# Altium PCB uTCA_MCH_PCB1_template.PcbDoc (part 1 of 2)
Units mm, origin at the board's own origin, x right, y up, seen from the top; angles counter-clockwise.
Board outline 182.75 x 75.8 mm, 2 copper layers (Top Layer, Bottom Layer); 3 components, 0 nets, 1517 pads, 0 vias.
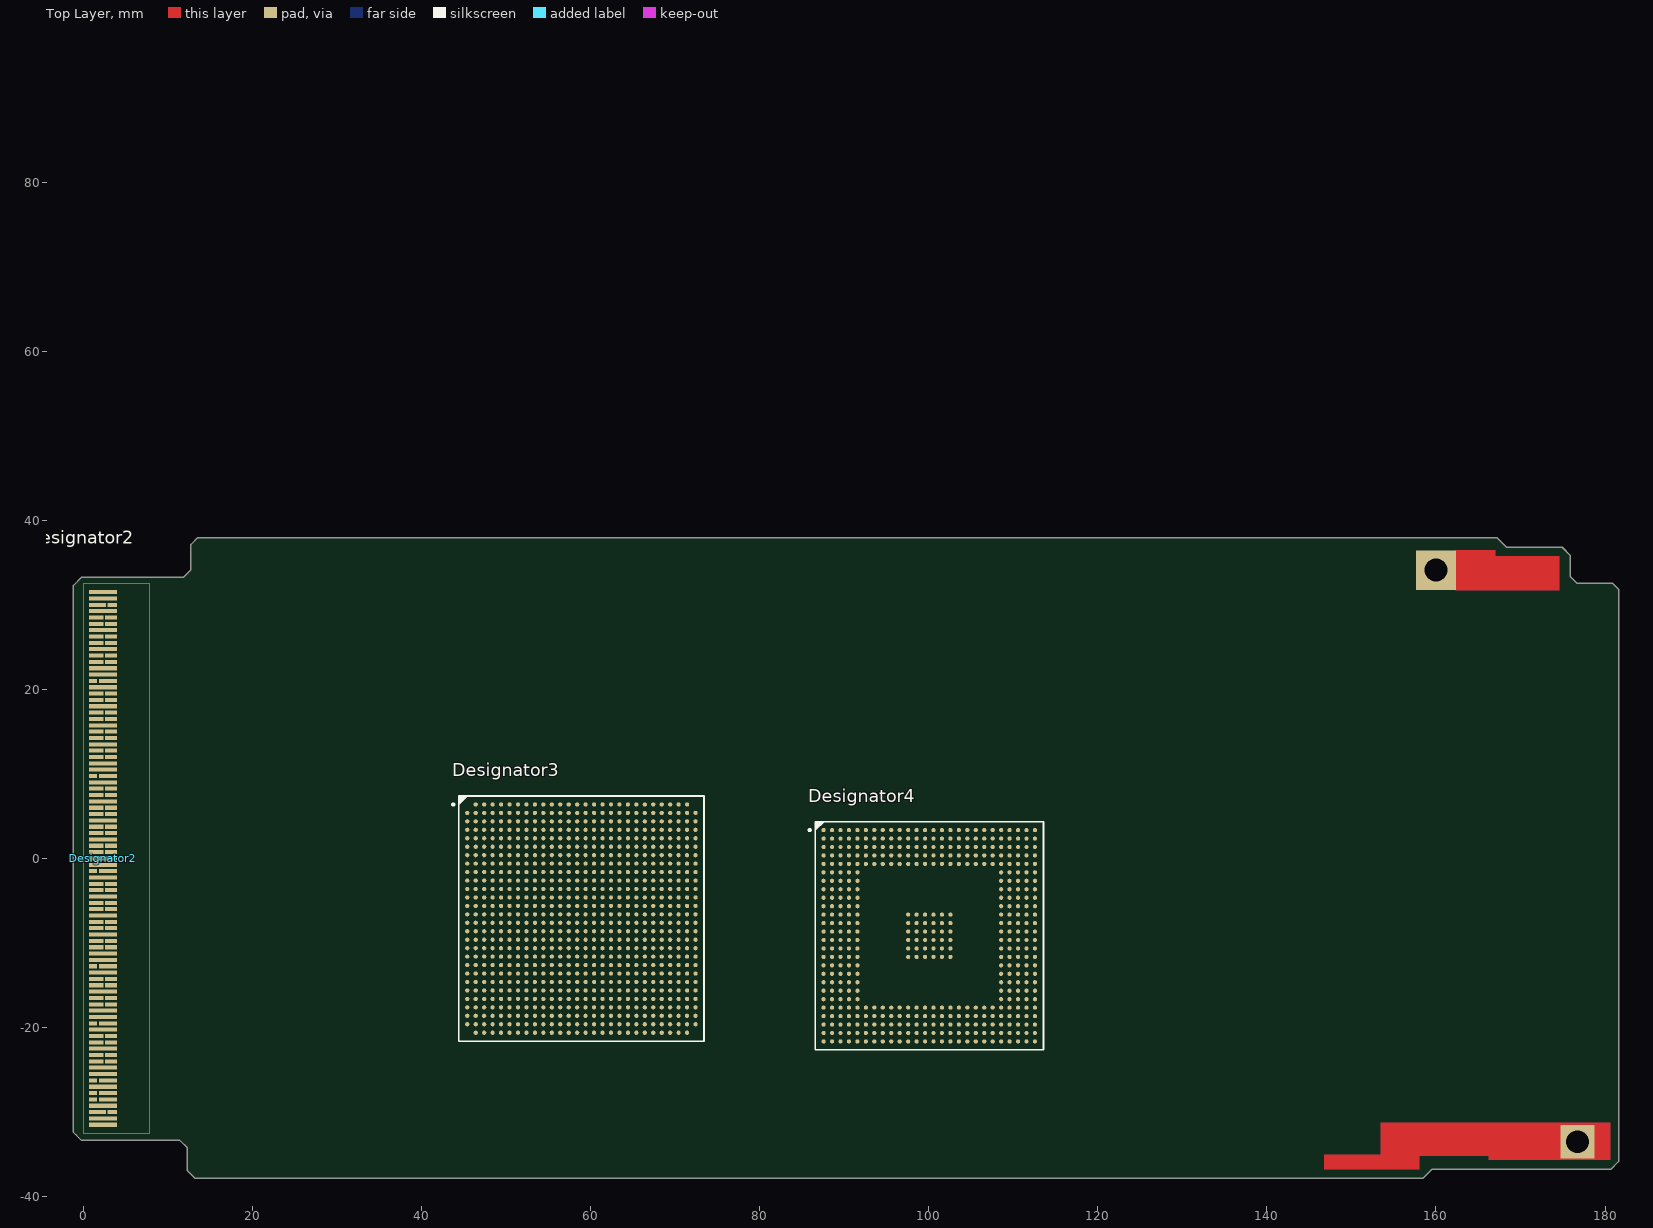
[diagram p0: Top Layer view]
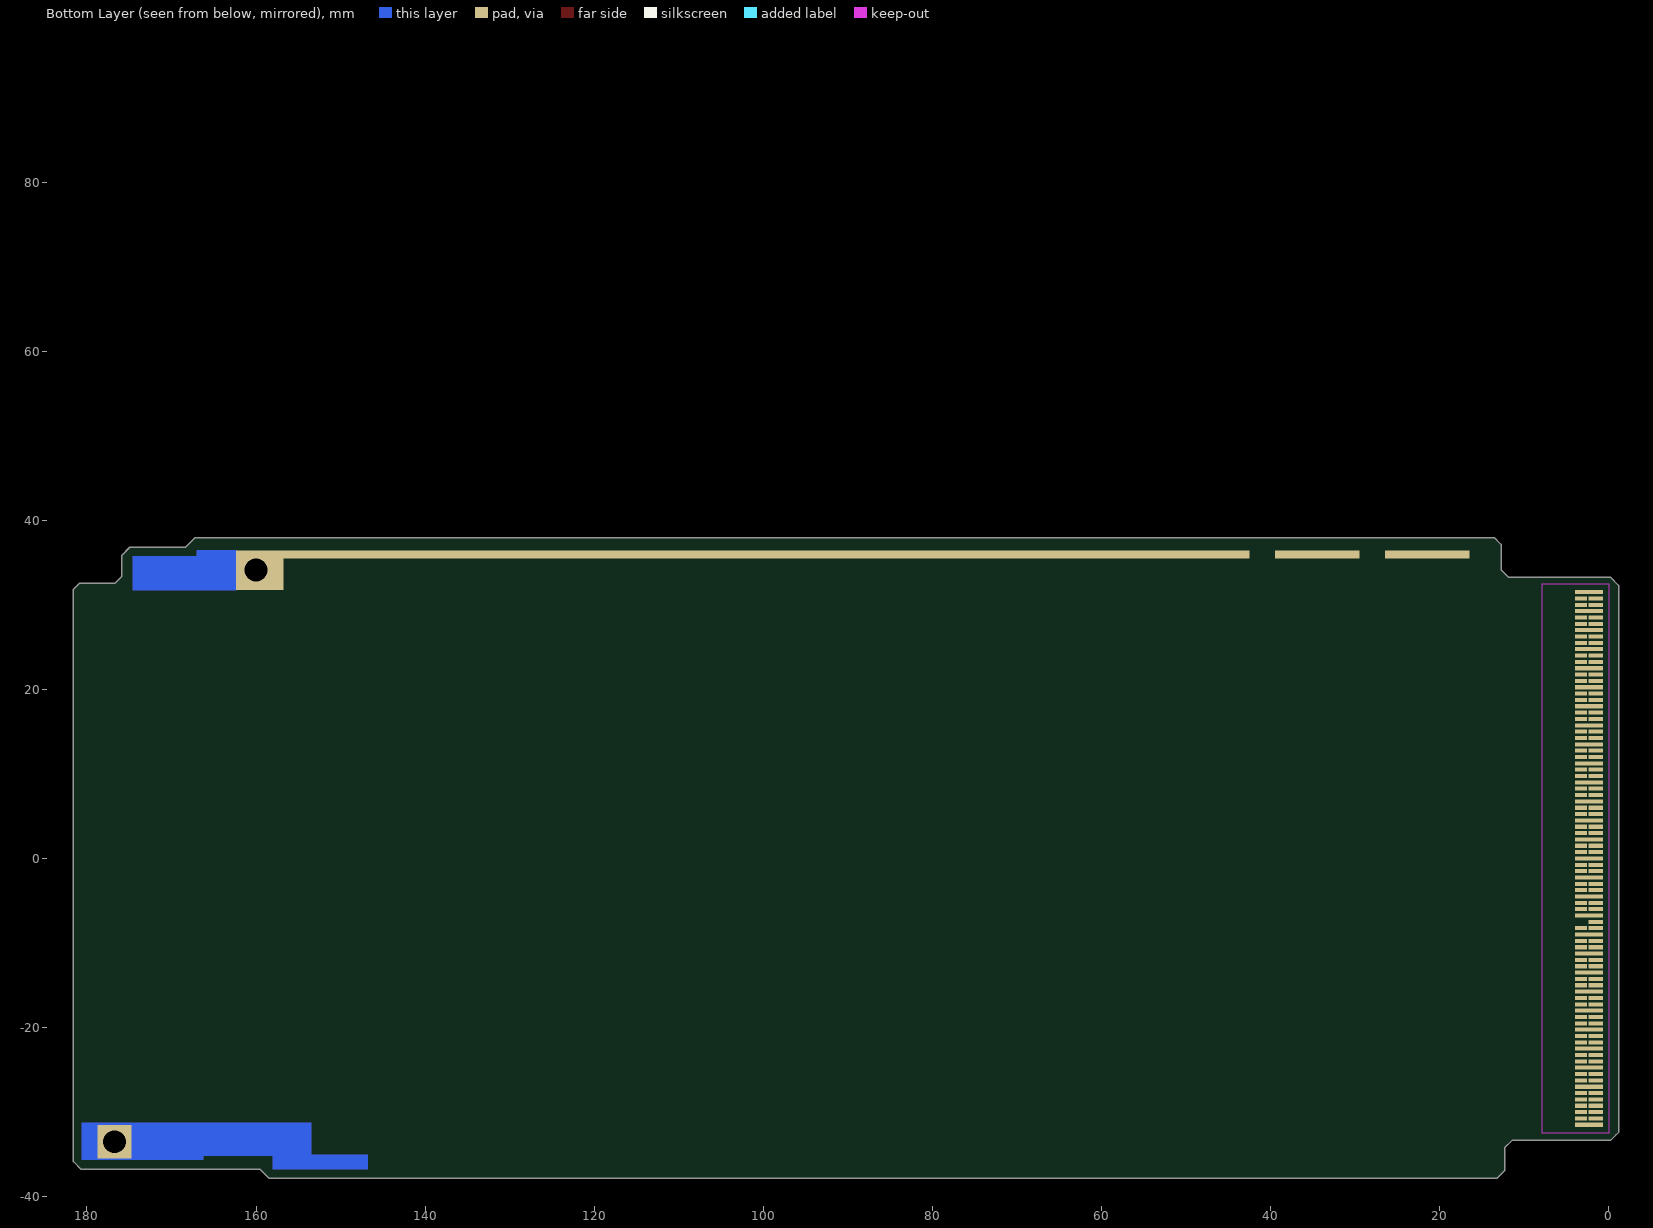
[diagram p1: Bottom Layer view, seen from below]

## Layer stack, top to bottom
Top Layer: signal copper 0.0356
Dielectric: dielectric 0.32, FR-4, Dk 4.8
Bottom Layer: signal copper 0.0356

## Board outline
-1.15,32.3 -0.2,33.25 11.6,33.25 11.85,33.25 12.75,34.15 12.75,37.15 13.55,37.95 167.2,37.95 168.35,36.8 174.95,36.8 175.9,35.85 175.9,33.35 176.7,32.55 180.9,32.55 181.6,31.85 181.6,-35.85 180.7,-36.75 159.55,-36.75 158.45,-37.85 13.25,-37.85 12.3,-36.9 12.3,-34.2 11.45,-33.35 -0.2,-33.35 -0.85,-32.7 -1.15,-32.4 -1.15,32.3

## Design rules (kind name [scope] priority, off if disabled: settings)
Clearance [All] p1: gap=0.254
HoleSize [All] p1: absolutevalues=TRUE maxlimit=3 minlimit=0.025 maxpercent=80.000 minpercent=20.000
PolygonConnect [All] p1: connectstyle=Relief reliefconductorwidth=0.254 reliefentries=4 polygonreliefangle="90 Angle"
RoutingVias [All] p1: holewidth=0.711 width=1.27 viastyle="Through Hole" minholewidth=0.711 minwidth=1.27 maxholewidth=0.711 maxwidth=1.27
SolderMaskExpansion [All] p1: expansion=0.102
TestPointUsage [All] p1: valid=0 allowmultiple=FALSE
Testpoint [All] p1: side=15 testpointundercomponent=TRUE minsize=1.016 maxsize=2.54 preferedsize=1.524 minholesize=0 maxholesize=1.016 preferedholesize=0.813 testpointgrid=0.025 style=1023 order=0123456789
Width [All] p1: maxlimit=0.254 minlimit=0.254 preferedwidth=0.254
18 further rules are at their usual default settings.

## Components (designator, comment, footprint, x,y, rotation, side; value= is the part's Value field where it differs from the comment)
Designator2 "Comment" UTCA_MCH_TONGUE1 0,0 r0 top
Designator3 "Comment" FBGA780-2 58.928,-7.112 r0 top
Designator4 "Comment" E-PBGA456_60 100.076,-9.144 r0 top

## Footprints (in the part's own frame and the unit in brackets; to place one, negate y for a bottom-side part, rotate by r counter-clockwise, add the part's x,y. Pads: shape width x height; smd on the part's side, far side on the other; paste and mask are expansions set on the pad)
E-PBGA456_60 [mm] "BGA, 456-Leads, Body 27x27mm, Pitch 1mm"
  round 0.5 smd: A1(-12.5,12.5) A2(-11.5,12.5) A3(-10.5,12.5) A4(-9.5,12.5) A5(-8.5,12.5) A6(-7.5,12.5) A7(-6.5,12.5) A8(-5.5,12.5) A9(-4.5,12.5) A10(-3.5,12.5) A11(-2.5,12.5) A12(-1.5,12.5) A13(-0.5,12.5) A14(0.5,12.5) A15(1.5,12.5) A16(2.5,12.5) A17(3.5,12.5) A18(4.5,12.5) A19(5.5,12.5) A20(6.5,12.5) A21(7.5,12.5) A22(8.5,12.5) A23(9.5,12.5) A24(10.5,12.5) A25(11.5,12.5) A26(12.5,12.5) AA1(-12.5,-7.5) AA2(-11.5,-7.5) AA3(-10.5,-7.5) AA4(-9.5,-7.5) AA5(-8.5,-7.5) AA22(8.5,-7.5) AA23(9.5,-7.5) AA24(10.5,-7.5) AA25(11.5,-7.5) AA26(12.5,-7.5) AB1(-12.5,-8.5) AB2(-11.5,-8.5) AB3(-10.5,-8.5) AB4(-9.5,-8.5) AB5(-8.5,-8.5) AB6(-7.5,-8.5) AB7(-6.5,-8.5) AB8(-5.5,-8.5) AB9(-4.5,-8.5) AB10(-3.5,-8.5) AB11(-2.5,-8.5) AB12(-1.5,-8.5) AB13(-0.5,-8.5) AB14(0.5,-8.5) AB15(1.5,-8.5) AB16(2.5,-8.5) AB17(3.5,-8.5) AB18(4.5,-8.5) AB19(5.5,-8.5) AB20(6.5,-8.5) AB21(7.5,-8.5) AB22(8.5,-8.5) AB23(9.5,-8.5) AB24(10.5,-8.5) AB25(11.5,-8.5) AB26(12.5,-8.5) AC1(-12.5,-9.5) AC2(-11.5,-9.5) AC3(-10.5,-9.5) AC4(-9.5,-9.5) AC5(-8.5,-9.5) AC6(-7.5,-9.5) AC7(-6.5,-9.5) AC8(-5.5,-9.5) AC9(-4.5,-9.5) AC10(-3.5,-9.5) AC11(-2.5,-9.5) AC12(-1.5,-9.5) AC13(-0.5,-9.5) AC14(0.5,-9.5) AC15(1.5,-9.5) AC16(2.5,-9.5) AC17(3.5,-9.5) AC18(4.5,-9.5) AC19(5.5,-9.5) AC20(6.5,-9.5) AC21(7.5,-9.5) AC22(8.5,-9.5) AC23(9.5,-9.5) AC24(10.5,-9.5) AC25(11.5,-9.5) AC26(12.5,-9.5) AD1(-12.5,-10.5) AD2(-11.5,-10.5) AD3(-10.5,-10.5) AD4(-9.5,-10.5) AD5(-8.5,-10.5) AD6(-7.5,-10.5) AD7(-6.5,-10.5) AD8(-5.5,-10.5) AD9(-4.5,-10.5) AD10(-3.5,-10.5) AD11(-2.5,-10.5) AD12(-1.5,-10.5) AD13(-0.5,-10.5) AD14(0.5,-10.5) AD15(1.5,-10.5) AD16(2.5,-10.5) AD17(3.5,-10.5) AD18(4.5,-10.5) AD19(5.5,-10.5) AD20(6.5,-10.5) AD21(7.5,-10.5) AD22(8.5,-10.5) AD23(9.5,-10.5) AD24(10.5,-10.5) AD25(11.5,-10.5) AD26(12.5,-10.5) AE1(-12.5,-11.5) AE2(-11.5,-11.5) AE3(-10.5,-11.5) AE4(-9.5,-11.5) AE5(-8.5,-11.5) AE6(-7.5,-11.5) AE7(-6.5,-11.5) AE8(-5.5,-11.5) AE9(-4.5,-11.5) AE10(-3.5,-11.5) AE11(-2.5,-11.5) AE12(-1.5,-11.5) AE13(-0.5,-11.5) AE14(0.5,-11.5) AE15(1.5,-11.5) AE16(2.5,-11.5) AE17(3.5,-11.5) AE18(4.5,-11.5) AE19(5.5,-11.5) AE20(6.5,-11.5) AE21(7.5,-11.5) AE22(8.5,-11.5) AE23(9.5,-11.5) AE24(10.5,-11.5) AE25(11.5,-11.5) AE26(12.5,-11.5) AF1(-12.5,-12.5) AF2(-11.5,-12.5) AF3(-10.5,-12.5) AF4(-9.5,-12.5) AF5(-8.5,-12.5) AF6(-7.5,-12.5) AF7(-6.5,-12.5) AF8(-5.5,-12.5) AF9(-4.5,-12.5) AF10(-3.5,-12.5) AF11(-2.5,-12.5) AF12(-1.5,-12.5) AF13(-0.5,-12.5) AF14(0.5,-12.5) AF15(1.5,-12.5) AF16(2.5,-12.5) AF17(3.5,-12.5) AF18(4.5,-12.5) AF19(5.5,-12.5) AF20(6.5,-12.5) AF21(7.5,-12.5) AF22(8.5,-12.5) AF23(9.5,-12.5) AF24(10.5,-12.5) AF25(11.5,-12.5) AF26(12.5,-12.5) B1(-12.5,11.5) B2(-11.5,11.5) B3(-10.5,11.5) B4(-9.5,11.5) B5(-8.5,11.5) B6(-7.5,11.5) B7(-6.5,11.5) B8(-5.5,11.5) B9(-4.5,11.5) B10(-3.5,11.5) B11(-2.5,11.5) B12(-1.5,11.5) B13(-0.5,11.5) B14(0.5,11.5) B15(1.5,11.5) B16(2.5,11.5) B17(3.5,11.5) B18(4.5,11.5) B19(5.5,11.5) B20(6.5,11.5) B21(7.5,11.5) B22(8.5,11.5) B23(9.5,11.5) B24(10.5,11.5) B25(11.5,11.5) B26(12.5,11.5) C1(-12.5,10.5) C2(-11.5,10.5) C3(-10.5,10.5) C4(-9.5,10.5) C5(-8.5,10.5) C6(-7.5,10.5) C7(-6.5,10.5) C8(-5.5,10.5) C9(-4.5,10.5) C10(-3.5,10.5) C11(-2.5,10.5) C12(-1.5,10.5) C13(-0.5,10.5) C14(0.5,10.5) C15(1.5,10.5) C16(2.5,10.5) C17(3.5,10.5) C18(4.5,10.5) C19(5.5,10.5) C20(6.5,10.5) C21(7.5,10.5) C22(8.5,10.5) C23(9.5,10.5) C24(10.5,10.5) C25(11.5,10.5) C26(12.5,10.5) D1(-12.5,9.5) D2(-11.5,9.5) D3(-10.5,9.5) D4(-9.5,9.5) D5(-8.5,9.5) D6(-7.5,9.5) D7(-6.5,9.5) D8(-5.5,9.5) D9(-4.5,9.5) D10(-3.5,9.5) D11(-2.5,9.5) D12(-1.5,9.5) D13(-0.5,9.5) D14(0.5,9.5) D15(1.5,9.5) D16(2.5,9.5) D17(3.5,9.5) D18(4.5,9.5) D19(5.5,9.5) D20(6.5,9.5) D21(7.5,9.5) D22(8.5,9.5) D23(9.5,9.5) D24(10.5,9.5) D25(11.5,9.5) D26(12.5,9.5) E1(-12.5,8.5) E2(-11.5,8.5) E3(-10.5,8.5) E4(-9.5,8.5) E5(-8.5,8.5) E6(-7.5,8.5) E7(-6.5,8.5) E8(-5.5,8.5) E9(-4.5,8.5) E10(-3.5,8.5) E11(-2.5,8.5) E12(-1.5,8.5) E13(-0.5,8.5) E14(0.5,8.5) E15(1.5,8.5) E16(2.5,8.5) E17(3.5,8.5) E18(4.5,8.5) E19(5.5,8.5) E20(6.5,8.5) E21(7.5,8.5) E22(8.5,8.5) E23(9.5,8.5) E24(10.5,8.5) E25(11.5,8.5) E26(12.5,8.5) F1(-12.5,7.5) F2(-11.5,7.5) F3(-10.5,7.5) F4(-9.5,7.5) F5(-8.5,7.5) F22(8.5,7.5) F23(9.5,7.5) F24(10.5,7.5) F25(11.5,7.5) F26(12.5,7.5) G1(-12.5,6.5) G2(-11.5,6.5) G3(-10.5,6.5) G4(-9.5,6.5) G5(-8.5,6.5) G22(8.5,6.5) G23(9.5,6.5) G24(10.5,6.5) G25(11.5,6.5) G26(12.5,6.5) H1(-12.5,5.5) H2(-11.5,5.5) H3(-10.5,5.5) H4(-9.5,5.5) H5(-8.5,5.5) H22(8.5,5.5) H23(9.5,5.5) H24(10.5,5.5) H25(11.5,5.5) H26(12.5,5.5) J1(-12.5,4.5) J2(-11.5,4.5) J3(-10.5,4.5) J4(-9.5,4.5) J5(-8.5,4.5) J22(8.5,4.5) J23(9.5,4.5) J24(10.5,4.5) J25(11.5,4.5) J26(12.5,4.5) K1(-12.5,3.5) K2(-11.5,3.5) K3(-10.5,3.5) K4(-9.5,3.5) K5(-8.5,3.5) K22(8.5,3.5) K23(9.5,3.5) K24(10.5,3.5) K25(11.5,3.5) K26(12.5,3.5) L1(-12.5,2.5) L2(-11.5,2.5) L3(-10.5,2.5) L4(-9.5,2.5) L5(-8.5,2.5) L11(-2.5,2.5) L12(-1.5,2.5) L13(-0.5,2.5) L14(0.5,2.5) L15(1.5,2.5) L16(2.5,2.5) L22(8.5,2.5) L23(9.5,2.5) L24(10.5,2.5) L25(11.5,2.5) L26(12.5,2.5) M1(-12.5,1.5) M2(-11.5,1.5) M3(-10.5,1.5) M4(-9.5,1.5) M5(-8.5,1.5) M11(-2.5,1.5) M12(-1.5,1.5) M13(-0.5,1.5) M14(0.5,1.5) M15(1.5,1.5) M16(2.5,1.5) M22(8.5,1.5) M23(9.5,1.5) M24(10.5,1.5) M25(11.5,1.5) M26(12.5,1.5) N1(-12.5,0.5) N2(-11.5,0.5) N3(-10.5,0.5) N4(-9.5,0.5) N5(-8.5,0.5) N11(-2.5,0.5) N12(-1.5,0.5) N13(-0.5,0.5) N14(0.5,0.5) N15(1.5,0.5) N16(2.5,0.5) N22(8.5,0.5) N23(9.5,0.5) N24(10.5,0.5) N25(11.5,0.5) N26(12.5,0.5) P1(-12.5,-0.5) P2(-11.5,-0.5) P3(-10.5,-0.5) P4(-9.5,-0.5) P5(-8.5,-0.5) P11(-2.5,-0.5) P12(-1.5,-0.5) P13(-0.5,-0.5) P14(0.5,-0.5) P15(1.5,-0.5) P16(2.5,-0.5) P22(8.5,-0.5) P23(9.5,-0.5) P24(10.5,-0.5) P25(11.5,-0.5) P26(12.5,-0.5) R1(-12.5,-1.5) R2(-11.5,-1.5) R3(-10.5,-1.5) R4(-9.5,-1.5) R5(-8.5,-1.5) R11(-2.5,-1.5) R12(-1.5,-1.5) R13(-0.5,-1.5) R14(0.5,-1.5) R15(1.5,-1.5) R16(2.5,-1.5) R22(8.5,-1.5) R23(9.5,-1.5) R24(10.5,-1.5) R25(11.5,-1.5) R26(12.5,-1.5) T1(-12.5,-2.5) T2(-11.5,-2.5) T3(-10.5,-2.5) T4(-9.5,-2.5) T5(-8.5,-2.5) T11(-2.5,-2.5) T12(-1.5,-2.5) T13(-0.5,-2.5) T14(0.5,-2.5) T15(1.5,-2.5) T16(2.5,-2.5) T22(8.5,-2.5) T23(9.5,-2.5) T24(10.5,-2.5) T25(11.5,-2.5) T26(12.5,-2.5) U1(-12.5,-3.5) U2(-11.5,-3.5) U3(-10.5,-3.5) U4(-9.5,-3.5) U5(-8.5,-3.5) U22(8.5,-3.5) U23(9.5,-3.5) U24(10.5,-3.5) U25(11.5,-3.5) U26(12.5,-3.5) V1(-12.5,-4.5) V2(-11.5,-4.5) V3(-10.5,-4.5) V4(-9.5,-4.5) V5(-8.5,-4.5) V22(8.5,-4.5) V23(9.5,-4.5) V24(10.5,-4.5) V25(11.5,-4.5) V26(12.5,-4.5) W1(-12.5,-5.5) W2(-11.5,-5.5) W3(-10.5,-5.5) W4(-9.5,-5.5) W5(-8.5,-5.5) W22(8.5,-5.5) W23(9.5,-5.5) W24(10.5,-5.5) W25(11.5,-5.5) W26(12.5,-5.5) Y1(-12.5,-6.5) Y2(-11.5,-6.5) Y3(-10.5,-6.5) Y4(-9.5,-6.5) Y5(-8.5,-6.5) Y22(8.5,-6.5) Y23(9.5,-6.5) Y24(10.5,-6.5) Y25(11.5,-6.5) Y26(12.5,-6.5)
  silkscreen extent -14.27,-13.5 13.5,13.5, body extent -13.5,-13.5 13.5,13.5, height 2.65
FBGA780-2 [mm] "BGA, 780-Leads, Body 29x29mm, Pitch 1mm"
  round 0.5 smd: A2(-12.5,13.5) A3(-11.5,13.5) A4(-10.5,13.5) A5(-9.5,13.5) A6(-8.5,13.5) A7(-7.5,13.5) A8(-6.5,13.5) A9(-5.5,13.5) A10(-4.5,13.5) A11(-3.5,13.5) A12(-2.5,13.5) A13(-1.5,13.5) A14(-0.5,13.5) A15(0.5,13.5) A16(1.5,13.5) A17(2.5,13.5) A18(3.5,13.5) A19(4.5,13.5) A20(5.5,13.5) A21(6.5,13.5) A22(7.5,13.5) A23(8.5,13.5) A24(9.5,13.5) A25(10.5,13.5) A26(11.5,13.5) A27(12.5,13.5) AA1(-13.5,-6.5) AA2(-12.5,-6.5) AA3(-11.5,-6.5) AA4(-10.5,-6.5) AA5(-9.5,-6.5) AA6(-8.5,-6.5) AA7(-7.5,-6.5) AA8(-6.5,-6.5) AA9(-5.5,-6.5) AA10(-4.5,-6.5) AA11(-3.5,-6.5) AA12(-2.5,-6.5) AA13(-1.5,-6.5) AA14(-0.5,-6.5) AA15(0.5,-6.5) AA16(1.5,-6.5) AA17(2.5,-6.5) AA18(3.5,-6.5) AA19(4.5,-6.5) AA20(5.5,-6.5) AA21(6.5,-6.5) AA22(7.5,-6.5) AA23(8.5,-6.5) AA24(9.5,-6.5) AA25(10.5,-6.5) AA26(11.5,-6.5) AA27(12.5,-6.5) AA28(13.5,-6.5) AB1(-13.5,-7.5) AB2(-12.5,-7.5) AB3(-11.5,-7.5) AB4(-10.5,-7.5) AB5(-9.5,-7.5) AB6(-8.5,-7.5) AB7(-7.5,-7.5) AB8(-6.5,-7.5) AB9(-5.5,-7.5) AB10(-4.5,-7.5) AB11(-3.5,-7.5) AB12(-2.5,-7.5) AB13(-1.5,-7.5) AB14(-0.5,-7.5) AB15(0.5,-7.5) AB16(1.5,-7.5) AB17(2.5,-7.5) AB18(3.5,-7.5) AB19(4.5,-7.5) AB20(5.5,-7.5) AB21(6.5,-7.5) AB22(7.5,-7.5) AB23(8.5,-7.5) AB24(9.5,-7.5) AB25(10.5,-7.5) AB26(11.5,-7.5) AB27(12.5,-7.5) AB28(13.5,-7.5) AC1(-13.5,-8.5) AC2(-12.5,-8.5) AC3(-11.5,-8.5) AC4(-10.5,-8.5) AC5(-9.5,-8.5) AC6(-8.5,-8.5) AC7(-7.5,-8.5) AC8(-6.5,-8.5) AC9(-5.5,-8.5) AC10(-4.5,-8.5) AC11(-3.5,-8.5) AC12(-2.5,-8.5) AC13(-1.5,-8.5) AC14(-0.5,-8.5) AC15(0.5,-8.5) AC16(1.5,-8.5) AC17(2.5,-8.5) AC18(3.5,-8.5) AC19(4.5,-8.5) AC20(5.5,-8.5) AC21(6.5,-8.5) AC22(7.5,-8.5) AC23(8.5,-8.5) AC24(9.5,-8.5) AC25(10.5,-8.5) AC26(11.5,-8.5) AC27(12.5,-8.5) AC28(13.5,-8.5) AD1(-13.5,-9.5) AD2(-12.5,-9.5) AD3(-11.5,-9.5) AD4(-10.5,-9.5) AD5(-9.5,-9.5) AD6(-8.5,-9.5) AD7(-7.5,-9.5) AD8(-6.5,-9.5) AD9(-5.5,-9.5) AD10(-4.5,-9.5) AD11(-3.5,-9.5) AD12(-2.5,-9.5) AD13(-1.5,-9.5) AD14(-0.5,-9.5) AD15(0.5,-9.5) AD16(1.5,-9.5) AD17(2.5,-9.5) AD18(3.5,-9.5) AD19(4.5,-9.5) AD20(5.5,-9.5) AD21(6.5,-9.5) AD22(7.5,-9.5) AD23(8.5,-9.5) AD24(9.5,-9.5) AD25(10.5,-9.5) AD26(11.5,-9.5) AD27(12.5,-9.5) AD28(13.5,-9.5) AE1(-13.5,-10.5) AE2(-12.5,-10.5) AE3(-11.5,-10.5) AE4(-10.5,-10.5) AE5(-9.5,-10.5) AE6(-8.5,-10.5) AE7(-7.5,-10.5) AE8(-6.5,-10.5) AE9(-5.5,-10.5) AE10(-4.5,-10.5) AE11(-3.5,-10.5) AE12(-2.5,-10.5) AE13(-1.5,-10.5) AE14(-0.5,-10.5) AE15(0.5,-10.5) AE16(1.5,-10.5) AE17(2.5,-10.5) AE18(3.5,-10.5) AE19(4.5,-10.5) AE20(5.5,-10.5) AE21(6.5,-10.5) AE22(7.5,-10.5) AE23(8.5,-10.5) AE24(9.5,-10.5) AE25(10.5,-10.5) AE26(11.5,-10.5) AE27(12.5,-10.5) AE28(13.5,-10.5) AF1(-13.5,-11.5) AF2(-12.5,-11.5) AF3(-11.5,-11.5) AF4(-10.5,-11.5) AF5(-9.5,-11.5) AF6(-8.5,-11.5) AF7(-7.5,-11.5) AF8(-6.5,-11.5) AF9(-5.5,-11.5) AF10(-4.5,-11.5) AF11(-3.5,-11.5) AF12(-2.5,-11.5) AF13(-1.5,-11.5) AF14(-0.5,-11.5) AF15(0.5,-11.5) AF16(1.5,-11.5) AF17(2.5,-11.5) AF18(3.5,-11.5) AF19(4.5,-11.5) AF20(5.5,-11.5) AF21(6.5,-11.5) AF22(7.5,-11.5) AF23(8.5,-11.5) AF24(9.5,-11.5) AF25(10.5,-11.5) AF26(11.5,-11.5) AF27(12.5,-11.5) AF28(13.5,-11.5) AG1(-13.5,-12.5) AG2(-12.5,-12.5) AG3(-11.5,-12.5) AG4(-10.5,-12.5) AG5(-9.5,-12.5) AG6(-8.5,-12.5) AG7(-7.5,-12.5) AG8(-6.5,-12.5) AG9(-5.5,-12.5) AG10(-4.5,-12.5) AG11(-3.5,-12.5) AG12(-2.5,-12.5) AG13(-1.5,-12.5) AG14(-0.5,-12.5) AG15(0.5,-12.5) AG16(1.5,-12.5) AG17(2.5,-12.5) AG18(3.5,-12.5) AG19(4.5,-12.5) AG20(5.5,-12.5) AG21(6.5,-12.5) AG22(7.5,-12.5) AG23(8.5,-12.5) AG24(9.5,-12.5) AG25(10.5,-12.5) AG26(11.5,-12.5) AG27(12.5,-12.5) AG28(13.5,-12.5) AH2(-12.5,-13.5) AH3(-11.5,-13.5) AH4(-10.5,-13.5) AH5(-9.5,-13.5) AH6(-8.5,-13.5) AH7(-7.5,-13.5) AH8(-6.5,-13.5) AH9(-5.5,-13.5) AH10(-4.5,-13.5) AH11(-3.5,-13.5) AH12(-2.5,-13.5) AH13(-1.5,-13.5) AH14(-0.5,-13.5) AH15(0.5,-13.5) AH16(1.5,-13.5) AH17(2.5,-13.5) AH18(3.5,-13.5) AH19(4.5,-13.5) AH20(5.5,-13.5) AH21(6.5,-13.5) AH22(7.5,-13.5) AH23(8.5,-13.5) AH24(9.5,-13.5) AH25(10.5,-13.5) AH26(11.5,-13.5) AH27(12.5,-13.5) B1(-13.5,12.5) B2(-12.5,12.5) B3(-11.5,12.5) B4(-10.5,12.5) B5(-9.5,12.5) B6(-8.5,12.5) B7(-7.5,12.5) B8(-6.5,12.5) B9(-5.5,12.5) B10(-4.5,12.5) B11(-3.5,12.5) B12(-2.5,12.5) B13(-1.5,12.5) B14(-0.5,12.5) B15(0.5,12.5) B16(1.5,12.5) B17(2.5,12.5) B18(3.5,12.5) B19(4.5,12.5) B20(5.5,12.5) B21(6.5,12.5) B22(7.5,12.5) B23(8.5,12.5) B24(9.5,12.5) B25(10.5,12.5) B26(11.5,12.5) B27(12.5,12.5) B28(13.5,12.5) C1(-13.5,11.5) C2(-12.5,11.5) C3(-11.5,11.5) C4(-10.5,11.5) C5(-9.5,11.5) C6(-8.5,11.5) C7(-7.5,11.5) C8(-6.5,11.5) C9(-5.5,11.5) C10(-4.5,11.5) C11(-3.5,11.5) C12(-2.5,11.5) C13(-1.5,11.5) C14(-0.5,11.5) C15(0.5,11.5) C16(1.5,11.5) C17(2.5,11.5) C18(3.5,11.5) C19(4.5,11.5) C20(5.5,11.5) C21(6.5,11.5) C22(7.5,11.5) C23(8.5,11.5) C24(9.5,11.5) C25(10.5,11.5) C26(11.5,11.5) C27(12.5,11.5) C28(13.5,11.5) D1(-13.5,10.5) D2(-12.5,10.5) D3(-11.5,10.5) D4(-10.5,10.5) D5(-9.5,10.5) D6(-8.5,10.5) D7(-7.5,10.5) D8(-6.5,10.5) D9(-5.5,10.5) D10(-4.5,10.5) D11(-3.5,10.5) D12(-2.5,10.5) D13(-1.5,10.5) D14(-0.5,10.5) D15(0.5,10.5) D16(1.5,10.5) D17(2.5,10.5) D18(3.5,10.5) D19(4.5,10.5) D20(5.5,10.5) D21(6.5,10.5) D22(7.5,10.5) D23(8.5,10.5) D24(9.5,10.5) D25(10.5,10.5) D26(11.5,10.5) D27(12.5,10.5) D28(13.5,10.5) E1(-13.5,9.5) E2(-12.5,9.5) E3(-11.5,9.5) E4(-10.5,9.5) E5(-9.5,9.5) E6(-8.5,9.5) E7(-7.5,9.5) E8(-6.5,9.5) E9(-5.5,9.5) E10(-4.5,9.5) E11(-3.5,9.5) E12(-2.5,9.5) E13(-1.5,9.5) E14(-0.5,9.5) E15(0.5,9.5) E16(1.5,9.5) E17(2.5,9.5) E18(3.5,9.5) E19(4.5,9.5) E20(5.5,9.5) E21(6.5,9.5) E22(7.5,9.5) E23(8.5,9.5) E24(9.5,9.5) E25(10.5,9.5) E26(11.5,9.5) E27(12.5,9.5) E28(13.5,9.5) F1(-13.5,8.5) F2(-12.5,8.5) F3(-11.5,8.5) F4(-10.5,8.5) F5(-9.5,8.5) F6(-8.5,8.5) F7(-7.5,8.5) F8(-6.5,8.5) F9(-5.5,8.5) F10(-4.5,8.5) F11(-3.5,8.5) F12(-2.5,8.5) F13(-1.5,8.5) F14(-0.5,8.5) F15(0.5,8.5) F16(1.5,8.5) F17(2.5,8.5) F18(3.5,8.5) F19(4.5,8.5) F20(5.5,8.5) F21(6.5,8.5) F22(7.5,8.5) F23(8.5,8.5) F24(9.5,8.5) F25(10.5,8.5) F26(11.5,8.5) F27(12.5,8.5) F28(13.5,8.5) G1(-13.5,7.5) G2(-12.5,7.5) G3(-11.5,7.5) G4(-10.5,7.5) G5(-9.5,7.5) G6(-8.5,7.5) G7(-7.5,7.5) G8(-6.5,7.5) G9(-5.5,7.5) G10(-4.5,7.5) G11(-3.5,7.5) G12(-2.5,7.5) G13(-1.5,7.5) G14(-0.5,7.5) G15(0.5,7.5) G16(1.5,7.5) G17(2.5,7.5) G18(3.5,7.5) G19(4.5,7.5) G20(5.5,7.5) G21(6.5,7.5) G22(7.5,7.5) G23(8.5,7.5) G24(9.5,7.5) G25(10.5,7.5) G26(11.5,7.5) G27(12.5,7.5) G28(13.5,7.5) H1(-13.5,6.5) H2(-12.5,6.5) H3(-11.5,6.5) H4(-10.5,6.5) H5(-9.5,6.5) H6(-8.5,6.5) H7(-7.5,6.5) H8(-6.5,6.5) H9(-5.5,6.5) H10(-4.5,6.5) H11(-3.5,6.5) H12(-2.5,6.5) H13(-1.5,6.5) H14(-0.5,6.5) H15(0.5,6.5) H16(1.5,6.5) H17(2.5,6.5) H18(3.5,6.5) H19(4.5,6.5) H20(5.5,6.5) H21(6.5,6.5) H22(7.5,6.5) H23(8.5,6.5) H24(9.5,6.5) H25(10.5,6.5) H26(11.5,6.5) H27(12.5,6.5) H28(13.5,6.5) J1(-13.5,5.5) J2(-12.5,5.5) J3(-11.5,5.5) J4(-10.5,5.5) J5(-9.5,5.5) J6(-8.5,5.5) J7(-7.5,5.5) J8(-6.5,5.5) J9(-5.5,5.5) J10(-4.5,5.5) J11(-3.5,5.5) J12(-2.5,5.5) J13(-1.5,5.5) J14(-0.5,5.5) J15(0.5,5.5) J16(1.5,5.5) J17(2.5,5.5) J18(3.5,5.5) J19(4.5,5.5) J20(5.5,5.5) J21(6.5,5.5) J22(7.5,5.5) J23(8.5,5.5) J24(9.5,5.5) J25(10.5,5.5) J26(11.5,5.5) J27(12.5,5.5) J28(13.5,5.5) K1(-13.5,4.5) K2(-12.5,4.5) K3(-11.5,4.5) K4(-10.5,4.5) K5(-9.5,4.5) K6(-8.5,4.5) K7(-7.5,4.5) K8(-6.5,4.5) K9(-5.5,4.5) K10(-4.5,4.5) K11(-3.5,4.5) K12(-2.5,4.5) K13(-1.5,4.5) K14(-0.5,4.5) K15(0.5,4.5) K16(1.5,4.5) K17(2.5,4.5) K18(3.5,4.5) K19(4.5,4.5) K20(5.5,4.5) K21(6.5,4.5) K22(7.5,4.5) K23(8.5,4.5) K24(9.5,4.5) K25(10.5,4.5) K26(11.5,4.5) K27(12.5,4.5) K28(13.5,4.5) L1(-13.5,3.5) L2(-12.5,3.5) L3(-11.5,3.5) L4(-10.5,3.5) L5(-9.5,3.5) L6(-8.5,3.5) L7(-7.5,3.5) L8(-6.5,3.5) L9(-5.5,3.5) L10(-4.5,3.5) L11(-3.5,3.5) L12(-2.5,3.5) L13(-1.5,3.5) L14(-0.5,3.5) L15(0.5,3.5) L16(1.5,3.5) L17(2.5,3.5) L18(3.5,3.5) L19(4.5,3.5) L20(5.5,3.5) L21(6.5,3.5) L22(7.5,3.5) L23(8.5,3.5) L24(9.5,3.5) L25(10.5,3.5) L26(11.5,3.5) L27(12.5,3.5) L28(13.5,3.5) M1(-13.5,2.5) M2(-12.5,2.5) M3(-11.5,2.5) M4(-10.5,2.5) M5(-9.5,2.5) M6(-8.5,2.5) M7(-7.5,2.5) M8(-6.5,2.5) M9(-5.5,2.5) M10(-4.5,2.5) M11(-3.5,2.5) M12(-2.5,2.5) M13(-1.5,2.5) M14(-0.5,2.5) M15(0.5,2.5) M16(1.5,2.5) M17(2.5,2.5) M18(3.5,2.5) M19(4.5,2.5) M20(5.5,2.5) M21(6.5,2.5) M22(7.5,2.5) M23(8.5,2.5) M24(9.5,2.5) M25(10.5,2.5) M26(11.5,2.5) M27(12.5,2.5) M28(13.5,2.5) N1(-13.5,1.5) N2(-12.5,1.5) N3(-11.5,1.5) N4(-10.5,1.5) N5(-9.5,1.5) N6(-8.5,1.5) N7(-7.5,1.5) N8(-6.5,1.5) N9(-5.5,1.5) N10(-4.5,1.5) N11(-3.5,1.5) N12(-2.5,1.5) N13(-1.5,1.5) N14(-0.5,1.5) N15(0.5,1.5) N16(1.5,1.5) N17(2.5,1.5) N18(3.5,1.5) N19(4.5,1.5) N20(5.5,1.5) N21(6.5,1.5) N22(7.5,1.5) N23(8.5,1.5) N24(9.5,1.5) N25(10.5,1.5) N26(11.5,1.5) N27(12.5,1.5) N28(13.5,1.5) P1(-13.5,0.5) P2(-12.5,0.5) P3(-11.5,0.5) P4(-10.5,0.5) P5(-9.5,0.5) P6(-8.5,0.5) P7(-7.5,0.5) P8(-6.5,0.5) P9(-5.5,0.5) P10(-4.5,0.5) P11(-3.5,0.5) P12(-2.5,0.5) P13(-1.5,0.5) P14(-0.5,0.5) P15(0.5,0.5) P16(1.5,0.5) P17(2.5,0.5) P18(3.5,0.5) P19(4.5,0.5) P20(5.5,0.5) P21(6.5,0.5) P22(7.5,0.5) P23(8.5,0.5) P24(9.5,0.5) P25(10.5,0.5) P26(11.5,0.5) P27(12.5,0.5) P28(13.5,0.5) R1(-13.5,-0.5) R2(-12.5,-0.5) R3(-11.5,-0.5) R4(-10.5,-0.5) R5(-9.5,-0.5) R6(-8.5,-0.5) R7(-7.5,-0.5) R8(-6.5,-0.5) R9(-5.5,-0.5) R10(-4.5,-0.5) R11(-3.5,-0.5) R12(-2.5,-0.5) R13(-1.5,-0.5) R14(-0.5,-0.5) R15(0.5,-0.5) R16(1.5,-0.5) R17(2.5,-0.5) R18(3.5,-0.5) R19(4.5,-0.5) R20(5.5,-0.5) R21(6.5,-0.5) R22(7.5,-0.5) R23(8.5,-0.5) R24(9.5,-0.5) R25(10.5,-0.5) R26(11.5,-0.5) R27(12.5,-0.5) R28(13.5,-0.5) T1(-13.5,-1.5) T2(-12.5,-1.5) T3(-11.5,-1.5) T4(-10.5,-1.5) T5(-9.5,-1.5) T6(-8.5,-1.5) T7(-7.5,-1.5) T8(-6.5,-1.5) T9(-5.5,-1.5) T10(-4.5,-1.5) T11(-3.5,-1.5) T12(-2.5,-1.5) T13(-1.5,-1.5) T14(-0.5,-1.5) T15(0.5,-1.5) T16(1.5,-1.5) T17(2.5,-1.5) T18(3.5,-1.5) T19(4.5,-1.5) T20(5.5,-1.5) T21(6.5,-1.5) T22(7.5,-1.5) T23(8.5,-1.5) T24(9.5,-1.5) T25(10.5,-1.5) T26(11.5,-1.5) T27(12.5,-1.5) T28(13.5,-1.5) U1(-13.5,-2.5) U2(-12.5,-2.5) U3(-11.5,-2.5) U4(-10.5,-2.5) U5(-9.5,-2.5) U6(-8.5,-2.5) U7(-7.5,-2.5) U8(-6.5,-2.5) U9(-5.5,-2.5) U10(-4.5,-2.5) U11(-3.5,-2.5) U12(-2.5,-2.5) U13(-1.5,-2.5) U14(-0.5,-2.5) U15(0.5,-2.5) U16(1.5,-2.5) U17(2.5,-2.5) U18(3.5,-2.5) U19(4.5,-2.5) U20(5.5,-2.5) U21(6.5,-2.5) U22(7.5,-2.5) U23(8.5,-2.5) U24(9.5,-2.5) U25(10.5,-2.5) U26(11.5,-2.5) U27(12.5,-2.5) U28(13.5,-2.5) V1(-13.5,-3.5) V2(-12.5,-3.5) V3(-11.5,-3.5) V4(-10.5,-3.5) V5(-9.5,-3.5) V6(-8.5,-3.5) V7(-7.5,-3.5) V8(-6.5,-3.5) V9(-5.5,-3.5) V10(-4.5,-3.5) V11(-3.5,-3.5) V12(-2.5,-3.5) V13(-1.5,-3.5) V14(-0.5,-3.5) V15(0.5,-3.5) V16(1.5,-3.5) V17(2.5,-3.5) V18(3.5,-3.5) V19(4.5,-3.5) V20(5.5,-3.5) V21(6.5,-3.5) V22(7.5,-3.5) V23(8.5,-3.5) V24(9.5,-3.5) V25(10.5,-3.5) V26(11.5,-3.5) V27(12.5,-3.5) V28(13.5,-3.5) W1(-13.5,-4.5) W2(-12.5,-4.5) W3(-11.5,-4.5) W4(-10.5,-4.5) W5(-9.5,-4.5) W6(-8.5,-4.5) W7(-7.5,-4.5) W8(-6.5,-4.5) W9(-5.5,-4.5) W10(-4.5,-4.5) W11(-3.5,-4.5) W12(-2.5,-4.5) W13(-1.5,-4.5) W14(-0.5,-4.5) W15(0.5,-4.5) W16(1.5,-4.5) W17(2.5,-4.5) W18(3.5,-4.5) W19(4.5,-4.5) W20(5.5,-4.5) W21(6.5,-4.5) W22(7.5,-4.5) W23(8.5,-4.5) W24(9.5,-4.5) W25(10.5,-4.5) W26(11.5,-4.5) W27(12.5,-4.5) W28(13.5,-4.5) Y1(-13.5,-5.5) Y2(-12.5,-5.5) Y3(-11.5,-5.5) Y4(-10.5,-5.5) Y5(-9.5,-5.5) Y6(-8.5,-5.5) Y7(-7.5,-5.5) Y8(-6.5,-5.5) Y9(-5.5,-5.5) Y10(-4.5,-5.5) Y11(-3.5,-5.5) Y12(-2.5,-5.5) Y13(-1.5,-5.5) Y14(-0.5,-5.5) Y15(0.5,-5.5) Y16(1.5,-5.5) Y17(2.5,-5.5) Y18(3.5,-5.5) Y19(4.5,-5.5) Y20(5.5,-5.5) Y21(6.5,-5.5) Y22(7.5,-5.5) Y23(8.5,-5.5) Y24(9.5,-5.5) Y25(10.5,-5.5) Y26(11.5,-5.5) Y27(12.5,-5.5) Y28(13.5,-5.5)
  silkscreen extent -15.27,-14.5 14.5,14.5, body extent -14.5,-14.5 14.5,14.5, height 2.6
UTCA_MCH_TONGUE1 [mm] "uTCA MTCA.0 MCH tongue connector"
  rect 3.3x0.48 smd: 1(2.35,-31.5) 2(2.35,-30.75) 4(2.35,-29.25) 7(2.35,-27) 9(2.35,-25.5) 10(2.35,-24.75) 13(2.35,-22.5) 16(2.35,-20.25) 18(2.35,-18.75) 19(2.35,-18) 22(2.35,-15.75) 25(2.35,-13.5) 27(2.35,-12) 28(2.35,-11.25) 31(2.35,-9) 34(2.35,-6.75) 37(2.35,-4.5) 40(2.35,-2.25) 42(2.35,-0.75) 43(2.35,0) 46(2.35,2.25) 49(2.35,4.5) 52(2.35,6.75) 55(2.35,9) 57(2.35,10.5) 58(2.35,11.25) 61(2.35,13.5) 64(2.35,15.75) 67(2.35,18) 70(2.35,20.25) 72(2.35,21.75) 73(2.35,22.5) 76(2.35,24.75) 79(2.35,27) 82(2.35,29.25) 84(2.35,30.75) 85(2.35,31.5)
  rect 0.95x0.48 smd: 2mate(1.175,-19.5) 2mate(1.175,-12.75) 2mate(1.175,-1.5) 2mate(1.175,9.75) 2mate(1.175,21) 2mate(1.175,-28.5) 2mate(1.175,-27.75) 2mate(1.175,-26.25)
  rect 1.1x0.48 smd: 3(3.45,-30) 83(3.45,30)
  rect 1.7x0.48 smd: 3mate(1.55,-24) 3mate(1.55,-23.25) 3mate(1.55,-21.75) 3mate(1.55,-21) 3mate(1.55,-17.25) 3mate(1.55,-16.5) 3mate(1.55,-15) 3mate(1.55,-14.25) 3mate(1.55,-10.5) 3mate(1.55,-9.75) 3mate(1.55,-8.25) 3mate(1.55,-7.5) 3mate(1.55,-6) 3mate(1.55,-5.25) 3mate(1.55,-3.75) 3mate(1.55,-3) 3mate(1.55,0.75) 3mate(1.55,1.5) 3mate(1.55,3) 3mate(1.55,3.75) 3mate(1.55,5.25) 3mate(1.55,6) 3mate(1.55,7.5) 3mate(1.55,8.25) 3mate(1.55,12) 3mate(1.55,12.75) 3mate(1.55,14.25) 3mate(1.55,15) 3mate(1.55,16.5) 3mate(1.55,17.25) 3mate(1.55,18.75) 3mate(1.55,19.5) 3mate(1.55,23.25) 3mate(1.55,24) 3mate(1.55,25.5) 3mate(1.55,26.25) 3mate(1.55,27.75) 3mate(1.55,28.5)
  rect 1.7x0.48 smd far side: 3mate(1.55,-30.75) 3mate(1.55,-30) 3mate(1.55,-29.25) 3mate(1.55,-28.5) 3mate(1.55,-27.75) 3mate(1.55,-26.25) 3mate(1.55,-25.5) 3mate(1.55,-24) 3mate(1.55,-23.25) 3mate(1.55,-21.75) 3mate(1.55,-21) 3mate(1.55,-19.5) 3mate(1.55,-18.75) 3mate(1.55,-17.25) 3mate(1.55,-16.5) 3mate(1.55,-15) 3mate(1.55,-14.25) 3mate(1.55,-12.75) 3mate(1.55,-12) 3mate(1.55,-10.5) 3mate(1.55,-9.75) 3mate(1.55,-8.25) 3mate(1.55,-7.5) 3mate(1.55,-6) 3mate(1.55,-5.25) 3mate(1.55,-3.75) 3mate(1.55,-3) 3mate(1.55,-1.5) 3mate(1.55,-0.75) 3mate(1.55,0.75) 3mate(1.55,1.5) 3mate(1.55,3) 3mate(1.55,3.75) 3mate(1.55,5.25) 3mate(1.55,6) 3mate(1.55,7.5) 3mate(1.55,8.25) 3mate(1.55,9.75) 3mate(1.55,10.5) 3mate(1.55,12) 3mate(1.55,12.75) 3mate(1.55,14.25) 3mate(1.55,15) 3mate(1.55,16.5) 3mate(1.55,17.25) 3mate(1.55,18.75) 3mate(1.55,19.5) 3mate(1.55,21) 3mate(1.55,21.75) 3mate(1.55,23.25) 3mate(1.55,24) 3mate(1.55,25.5) 3mate(1.55,26.25) 3mate(1.55,27.75) 3mate(1.55,28.5) 3mate(1.55,30) 3mate(1.55,30.75)
  rect 2.15x0.48 smd: 5(2.925,-28.5) 6(2.925,-27.75) 8(2.925,-26.25) 17(2.925,-19.5) 26(2.925,-12.75) 41(2.925,-1.5) 56(2.925,9.75) 71(2.925,21)
  rect 1.4x0.48 smd: 11(3.3,-24) 12(3.3,-23.25) 14(3.3,-21.75) 15(3.3,-21) 20(3.3,-17.25) 21(3.3,-16.5) 23(3.3,-15) 24(3.3,-14.25) 29(3.3,-10.5) 30(3.3,-9.75) 32(3.3,-8.25) 33(3.3,-7.5) 35(3.3,-6) 36(3.3,-5.25) 38(3.3,-3.75) 39(3.3,-3) 44(3.3,0.75) 45(3.3,1.5) 47(3.3,3) 48(3.3,3.75) 50(3.3,5.25) 51(3.3,6) 53(3.3,7.5) 54(3.3,8.25) 59(3.3,12) 60(3.3,12.75) 62(3.3,14.25) 63(3.3,15) 65(3.3,16.5) 66(3.3,17.25) 68(3.3,18.75) 69(3.3,19.5) 74(3.3,23.25) 75(3.3,24) 77(3.3,25.5) 78(3.3,26.25) 80(3.3,27.75) 81(3.3,28.5)
  rect 3.3x0.48 smd far side: 86(2.35,31.5) 89(2.35,29.25) 92(2.35,27) 95(2.35,24.75) 98(2.35,22.5) 101(2.35,20.25) 104(2.35,18) 107(2.35,15.75) 110(2.35,13.5) 113(2.35,11.25) 116(2.35,9) 119(2.35,6.75) 122(2.35,4.5) 125(2.35,2.25) 128(2.35,0) 131(2.35,-2.25) 134(2.35,-4.5) 137(2.35,-6.75) 140(2.35,-9) 143(2.35,-11.25) 146(2.35,-13.5) 149(2.35,-15.75) 152(2.35,-18) 155(2.35,-20.25) 158(2.35,-22.5) 161(2.35,-24.75) 164(2.35,-27) 170(2.35,-31.5)
  rect 1.4x0.48 smd far side: 87(3.3,30.75) 88(3.3,30) 90(3.3,28.5) 91(3.3,27.75) 93(3.3,26.25) 94(3.3,25.5) 96(3.3,24) 97(3.3,23.25) 99(3.3,21.75) 100(3.3,21) 102(3.3,19.5) 103(3.3,18.75) 105(3.3,17.25) 106(3.3,16.5) 108(3.3,15) 109(3.3,14.25) 111(3.3,12.75) 112(3.3,12) 114(3.3,10.5) 115(3.3,9.75) 117(3.3,8.25) 118(3.3,7.5) 120(3.3,6) 121(3.3,5.25) 123(3.3,3.75) 124(3.3,3) 126(3.3,1.5) 127(3.3,0.75) 129(3.3,-0.75) 130(3.3,-1.5) 132(3.3,-3) 133(3.3,-3.75) 135(3.3,-5.25) 136(3.3,-6) 139(3.3,-8.25) 141(3.3,-9.75) 142(3.3,-10.5) 144(3.3,-12) 145(3.3,-12.75) 147(3.3,-14.25) 148(3.3,-15) 150(3.3,-16.5) 151(3.3,-17.25) 153(3.3,-18.75) 154(3.3,-19.5) 156(3.3,-21) 157(3.3,-21.75) 159(3.3,-23.25) 160(3.3,-24) 162(3.3,-25.5) 163(3.3,-26.25) 165(3.3,-27.75) 166(3.3,-28.5) 167(3.3,-29.25) 168(3.3,-30) 169(3.3,-30.75)
  rect 1.4x0.48 on Bottom Solder: 138(3.3,-7.5)
  rect 2x0.48 smd: lmate(1.7,30) lmate(1.7,-30)
  Keep-Out Layer region: 0,-32.5 7.9,-32.5 7.9,32.5 0,32.5

## Free pads (board coordinates)
  rect 4x4 hole 2.7: 7(176.75,-33.5)
  rect 10x1 smd far side: ESD_STRIP_SEGMENT_1(21.5,35.95) ESD_STRIP_SEGMENT_2(34.5,35.95)
  rect 119x1 smd far side: ESD_STRIP_SEGMENT_3(102,35.95)
  rect 1x4.7 smd far side: ESD_STRIP_SEGMENT_3(157.25,34.1)
  rect 4.7x4.7 hole 2.7: ESD_STRIP_SEGMENT_3(160,34.1)